# Altium PCB LightningDetector.PcbDoc
Units mil, origin at the board's own origin, x right, y up, seen from the top; angles counter-clockwise.
Board outline 1050 x 1050 mil, 2 copper layers (L1, L2), stack 62.8 mil thick; 18 components, 14 nets, 63 pads, 17 vias.
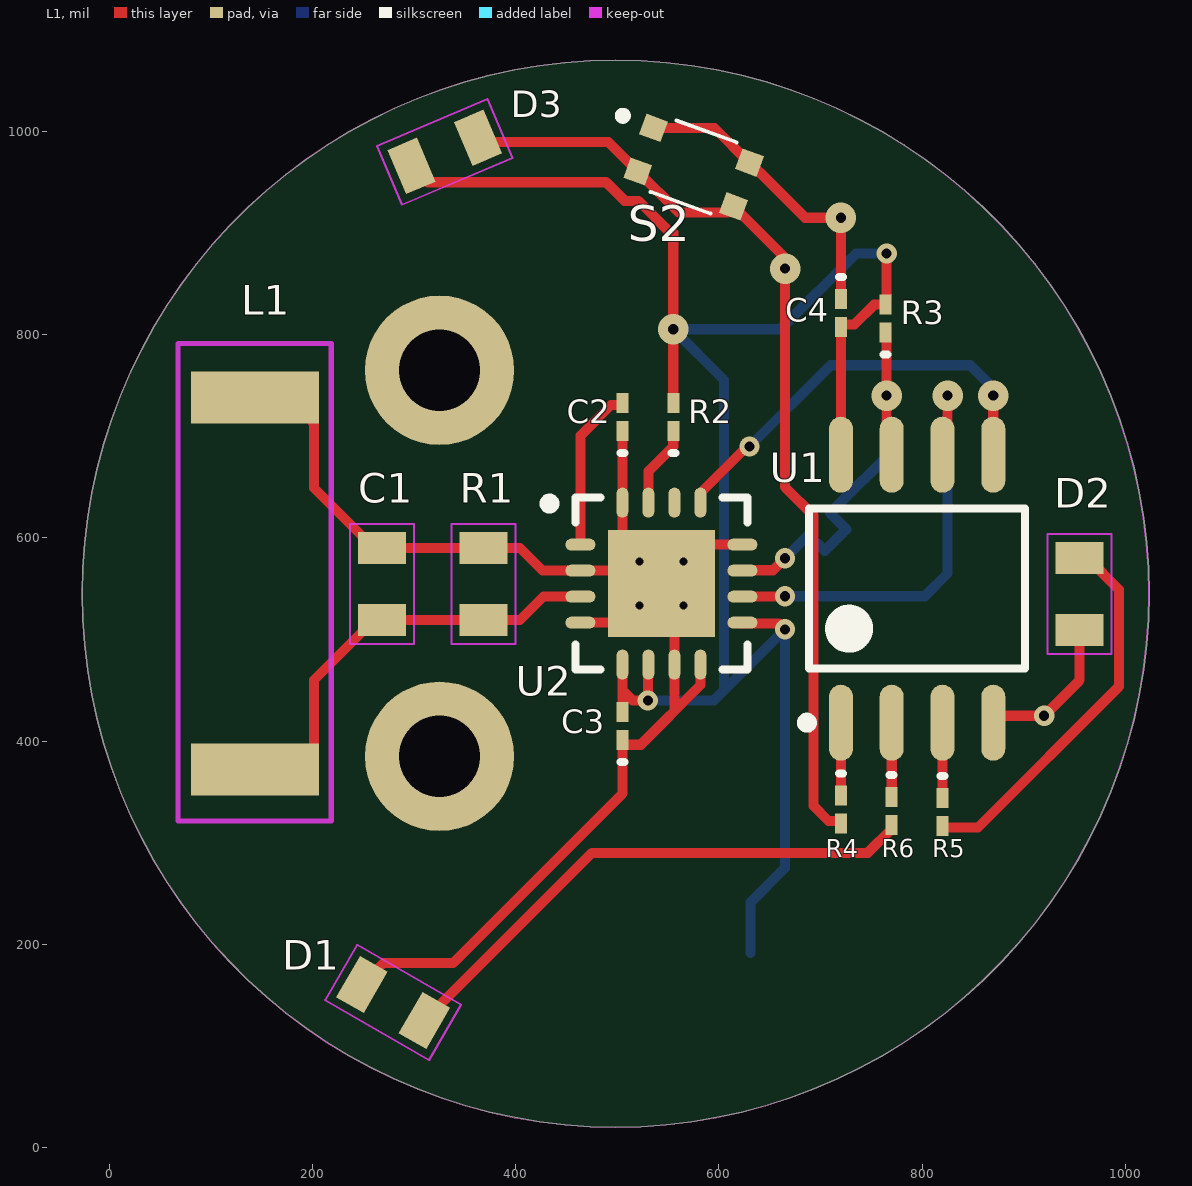
[diagram p0: L1 view]
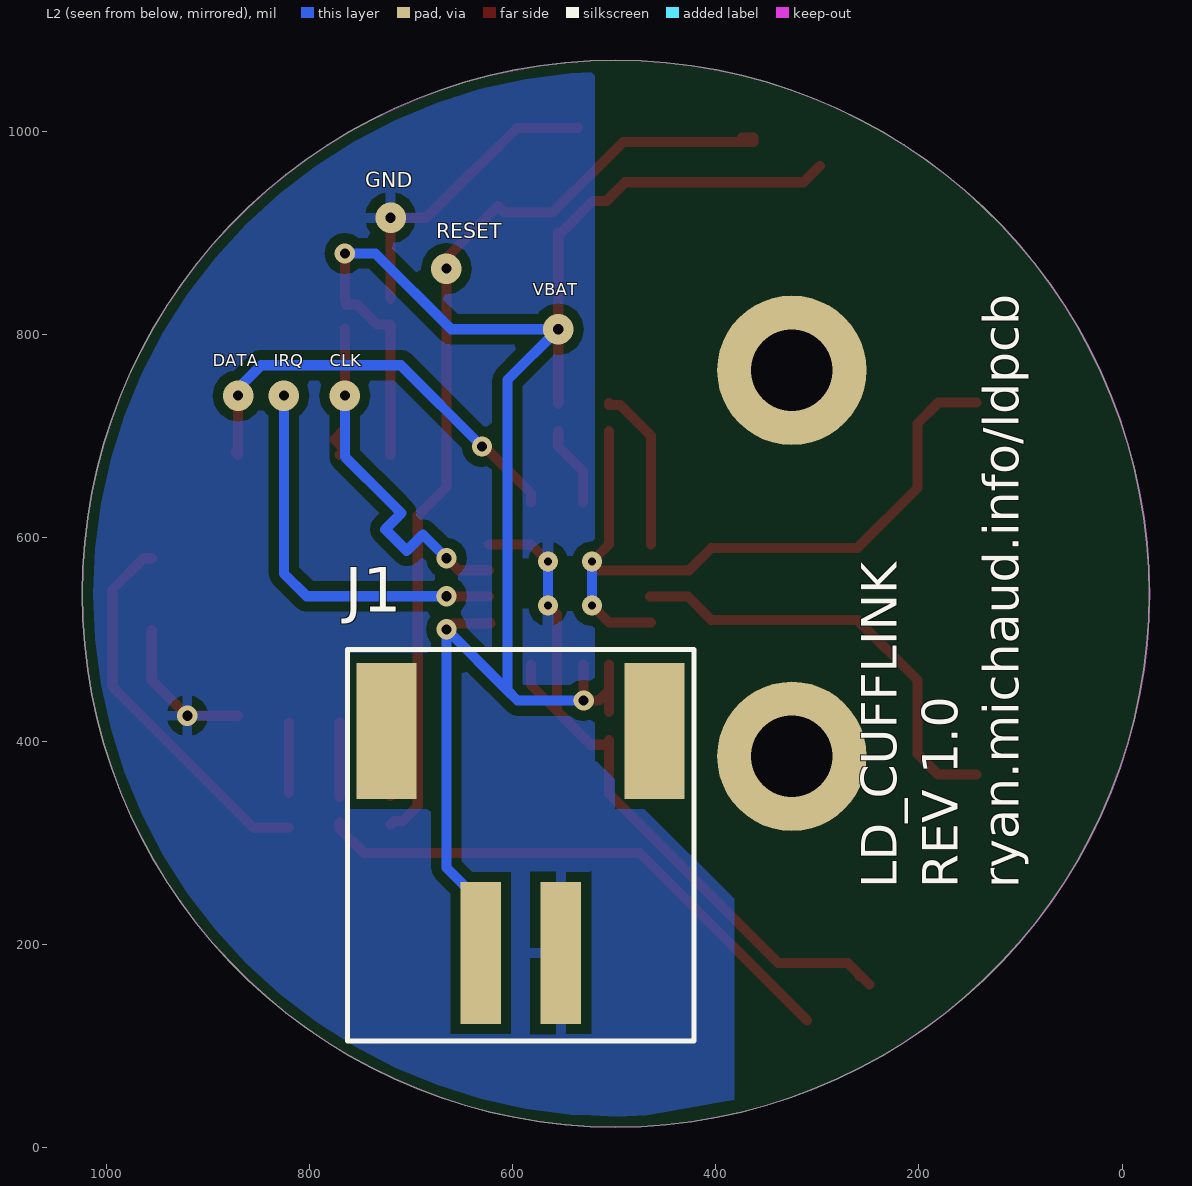
[diagram p1: L2 view, seen from below]

## Layer stack, top to bottom
Top Solder: solder mask 0.1, Solder Resist, Dk 1
L1: signal copper 1.4
Core: dielectric 60, FR-4, Dk 4.6
L2: signal copper 1.4
Bottom Solder: solder mask 0.1, Solder Resist, Dk 1

## Board outline
498.38,20.06 cw(c498.38,545.06) -26.62,545.06 cw(c498.38,545.06) 498.38,1070.06 cw(c498.38,545.06) 1023.38,545.06 cw(c498.38,545.06)

## Design rules (kind name [scope] priority, off if disabled: settings)
Clearance [All] p1: gap=10 ignorepadtopadclearanceinfootprint=FALSE except(0: Arc-Hole Track-Hole SMDPad-Hole THPad-Hole Via-Hole Fill-Hole Poly-Hole Region-Hole Text-Hole)
PolygonConnect [All] p1: connectstyle=Relief reliefconductorwidth=10 reliefentries=4 polygonreliefangle="90 Angle" airgapwidth=10
RoutingVias [All] p1: holewidth=28 width=50 viastyle="Through Hole" minholewidth=28 minwidth=50 maxholewidth=28 maxwidth=50
SolderMaskExpansion [All] p1: expansion=4
Width [All] p1: maxlimit=10 minlimit=10 preferedwidth=10
30 further rules are at their usual default settings.

## Components (designator, comment, footprint, x,y, rotation, side; value= is the part's Value field where it differs from the comment)
C1 "885382207004" 0805 268.38,554.63 r270 top locked value=950pF
C2 "JMK107ABJ106KA-T" 0603 505,718.78 r90 top value=10uF
C3 "CC0603KRX5R8BB105" 0603 505,415 r90 top value=1.0uF
C4 "CC0603JRX7R9BB104" 0603 720,821.22 r270 top value=0.1uF
D1 "LED0" 0805 279.32,142.72 r150 top
D2 "LED0" 0805 955,544.57 r270 top
D3 "LED0" 0805 330,980 r23 top
J1 "1769" 1769 526.18,410 r0 bottom locked
L1 "MA5532-AE" MA5532-AE 143.38,555.06 r90 top locked
R1 "WIN-T0805LF-11-1002-A" 0805 368.38,554.63 r270 top locked value=10K
R2 "ESR03EZPJ222" 0603 555,718.78 r90 top value=2.2K
R3 "CRCW060310K0JNEAC" 0603 764.09,815.79 r90 top value=10K
R4 "RC0603FR-07220RL" 0603 720,332.44 r270 top value=220
R5 "RC0603FR-07220RL" 0603 820,330 r270 top value=220
R6 "RC0603FR-07220RL" 0603 770,331.22 r270 top value=220
S2 "USLPT2819DT2TR" USLPT2819DT2TR 575,965 r340 top
U1 "ATtiny85-20SH" 8S2_L 795,550 r90 top locked
U2 "AS3935-BQFT" AMS-MLPQ-16-4000X4000DE-2675X2675TP_N 543.38,555.06 r0 top locked

## Footprints (in the part's own frame and the unit in brackets; to place one, negate y for a bottom-side part, rotate by r counter-clockwise, add the part's x,y. Pads: shape width x height; smd on the part's side, far side on the other; paste and mask are expansions set on the pad)
8S2_L [mm] "SOP, 8-Leads, Body 5.3x5.3mm, Pitch 1.27mm, IPC High Density"
  oval 1.9x0.6 smd: 1(-3.35,1.905) 2(-3.35,0.635) 3(-3.35,-0.635) 4(-3.35,-1.905) 5(3.35,-1.905) 6(3.35,-0.635) 7(3.35,0.635) 8(3.35,1.905)
  silkscreen extent -3.47,-2.7 2,2.88, body extent -2.7,-2.68 2.7,2.68, height 2.16
0603 [mm] "Chip Inductor, Body 0.6x0.3mm, IPC High Density"
  rect 0.5x0.3 smd: 1(-0.35,0) 2(0.35,0)
  silkscreen extent -0.9,-0.05 -0.9,0.05, body extent -0.33,-0.18 0.33,0.18, height 0.55
0805 [mil]
  rect 31.5x47.24 smd: 1(-35.43,0) 2(35.43,0)
  L1 keep-out lines w2: 59.06,-31.5 -59.06,-31.5 -59.06,31.5 59.06,31.5 59.06,-31.5
1769 [mm] "Adafruit Accessories JST-PH 2-pin SMT Right Angle Connect"
  rect 1.016x3.556 smd: 1(0.667,5.55) 2(2.667,5.55)
  rect 1.5x3.4 smd: ""(-1.681,0) ""(5.02,0)
  silkscreen extent -2.67,-2.03 5.99,7.75
AMS-MLPQ-16-4000X4000DE-2675X2675TP_N [mm] "QFN, 16-Leads, Body 4x4mm, Pitch 0.65mm, Thermal Pad 2.675x2.675mm, IPC Medium Density"
  oval 0.75x0.3 smd: 1(-2.025,0.975) 2(-2.025,0.325) 3(-2.025,-0.325) 4(-2.025,-0.975) 9(2.025,-0.975) 10(2.025,-0.325) 11(2.025,0.325) 12(2.025,0.975)
  oval 0.3x0.75 smd: 5(-0.975,-2.025) 6(-0.325,-2.025) 7(0.325,-2.025) 8(0.975,-2.025) 13(0.975,2.025) 14(0.325,2.025) 15(-0.325,2.025) 16(-0.975,2.025)
  rect 2.675x2.675 smd: 17(0,0)
  silkscreen extent -2.92,-2.15 2.15,2.15, body extent -2,-2 2,2, height 0.8
MA5532-AE [mil]
  rect 51.18x126 smd: 1(-183.07,0) 2(183.07,0)
  L1 keep-out lines w5: -233.87,76 -233.87,-75 236.13,-75 236.13,76 -233.87,76
USLPT2819DT2TR [mm]
  rect 0.57x0.55 smd: T1(-1.275,0.58) T2(1.275,0.58) T3(-1.275,-0.58) T4(1.275,-0.58)
  silkscreen extent -2.2,-0.95 0.8,0.95, body extent -1.51,-0.95 1.51,0.95, height 0.7

## Part data
C1 C2 C3 C4: library part Cap, "Capacitor"
  C1: PackageDescription=0805, Part Number=885382207004
  C2: PackageDescription="Multilayer Ceramic Capacitors MLCC - SMD/SMT 0603 6.3V 10uF 10% X5R", PackageReference=0603
  C3: PackageDescription="Multilayer Ceramic Capacitors MLCC - SMD/SMT 1.0uF 25V X5R 10%", PackageReference=0603
  C4: PackageDescription="Multilayer Ceramic Capacitors MLCC - SMD/SMT .1uF 50V X7R 5%", PackageReference=0603
D1 D2 D3: "Typical INFRARED GaAs LED", LatestRevisionDate=08-Jul-2005, LatestRevisionNote="Mech Layer 1 removed.", PackageDescription="LED; 2 Leads", PackageReference=LED-0, Published=8-Jun-2000, Publisher="Altium Limited"
J1: "Adafruit Accessories JST-PH 2-pin SMT Right Angle Connect"
R1 R2 R3 R4 R5 R6: library part Res1, "Resistor"
  R1: PackageDescription="Axial Device, Thru-Hole; 2 Leads; 0.3 in Pin Spacing", PackageReference=0805, Part Number=WIN-T0805LF-11-1002-A
  R2: PackageDescription="Thick Film Resistors - SMD 0603 2K2ohm 5% Anti Surge AEC-Q200", PackageReference=0603, Part Number=ESR03EZPJ222
  R3: PackageDescription="Thick Film Resistors - SMD 1/10Watt 10Kohms 5% Commercial Use", PackageReference=0603
  R4: PackageDescription="Axial Device, Thru-Hole; 2 Leads; 0.3 in Pin Spacing", PackageReference=0603
  R5 R6: PackageDescription="Thick Film Resistors - SMD 220 OHM 1%", PackageReference=0603
S2: "Switch", Manufacturer_Name="TE Connectivity", Mouser Part Number=506-USLPT2819DT2TR, Datasheet Link=https://componentsearchengine.com/Datasheets/1/USLPT2819DT2TR.pdf, Height=0.6mm, Manufacturer_Part_Number=USLPT2819DT2TR, Mouser Price/Stock=https://www.mouser.com/Search/Refine.aspx?Keyword=506-USLPT2819DT2TR
U1: library part CMP-0093-00347-1, "8-bit AVR Microcontroller, 20MHz, 2.7-5.5V, 8K Flash, 512 Bytes EEPROM, 512 Bytes SRAM, Industrial Grade (-40°C to 85°C), 8-Lead SOIC, Pb-Free", ComponentLink1Description="Manufacturer URL", ComponentLink1URL=http://www.atmel.com/, ComponentLink2Description="ATtiny25/45/85 Datasheet", ComponentLink2URL=http://www.atmel.com/dyn/resources/prod_documents/doc2586.pdf, ComponentLink3Description="ATtiny25/45/85 Summary", ComponentLink3URL=http://www.atmel.com/dyn/resources/prod_documents/2586S.pdf, DatasheetVersion="revN, Apr-2011", PackageDescription="8-Lead, 0.208\" Body, Plastic Small Outline Package (EIAJ)", PackageReference=8S2, PackageVersion="revF, Apr-2008"
U2: library part CMP-0557-00001-2, "Franklin Lightning Sensor(TM) IC, 2.4 to 5.5 V, MLPQ-16, Pb-Free, Reel", Current Consumption (uA)="0.4 / 50 / 210", Manufacturer=AMS, ComponentLink1Description="Manufacturer URL", ComponentLink1URL=www.ams.com, ComponentLink2Description=Datasheet, ComponentLink2URL=http://www.ams.com/eng/content/download/249847/974777/143418, DatasheetVersion="Rev. 1.2", Interface="SPI or I²C", Mounting Technology="Surface Mount", PackageDescription="16-Pin Plastic Quad Flatpack, No Leads, 4 x 4 mm Body, 0.65 mm Pitch, 2.675 x 2.675 mm Exposed Pad", PackageReference=MLPQ-16, PackageVersion="Rev. 1.2, 07/2012", PartNumber=AS3935-BQFT, Supply (V)="2.4 to 5.5"
L1: DeviceSetName=MA5532-AE, GateName_1=G$1, LibraryName=SparkFun-Coils, Package=MA5532-AE, PROD_ID=NDUC-11334, SymbolName_1=INDUCTOR-1

## Free pads (board coordinates)
  round 147 hole 80: 2(325,765) 3(325,385)

## Via types
v1: diameter 30, hole 10, L1 to L2, 6 vias
v2: diameter 20, hole 10, L1 to L2, 6 vias
v3: diameter 19.68, hole 7.87, L1 to L2, 4 vias
v4: diameter 20/20 (per signal layer), hole 10, L1 to L2, 1 vias

## Nets (pads, with @x,y where several pads share a name; then routed paths per layer and width w, separated by ;. In a path a pad name is that pad's centre, name@x,y a point inside that pad or via, vN(x,y) a via of type N, cw(c..) or ccw(c..) an arc to the next point about the centre after c; other vN are vias at no path point)
AC_GND: C2.2 U2.1 | length 162.8
  L1 w10: U2.1 463.65,700.61 493.79,730.75 505,730.75 C2.2
ADD0: R2.1 U2.15 | length 80.3
  L1 w10: U2.15 530.58,665.58 555,690 R2.1
ANT_IN: C1.2 L1.1 R1.2 U2.3 | length 436.2
  L1 w10: L1.1@143.38,366.99 180.79,366.99 201.38,387.58 201.38,460.07 260.51,519.2 C1.2 R1.2 404.2,519.2 427.27,542.26 U2.3@464.54,542.26
GND: C1.1 C2.1 C3.1 C4.1 D1.2 D2.2 J1.1 L1.2 R1.1 S2.T1 S2.T2 U1.4 U2.2 U2.4 U2.7 U2.8 U2.12 U2.16 U2.17 | length 1918.3
  L1 w10: L1.2@143.38,733.13 180.79,733.13 201.38,712.54 201.38,649.19 260.51,590.06 C1.1 R1.1 404.17,590.06 426.38,567.86 U2.2 U2.17@521.72,567.86 ; D1.2@258.33,168.33 256.53,168.33 D1.2 269.84,181.64 338.36,181.64 505,348.28 C3.1@505,397.28 ; U2.4 504.99,516.67 v3(521.72,533.41) ; C2.1 U2.16 504.99,593.45 v3(521.72,576.71) ; S2.T1 535.77,1003.49 595.54,1003.49 629.74,969.29 S2.T2 630.21,969.29 639.5,960 640,960 684.84,915.16 v1(720,915.16) C4.1 ; 556.17,430 U2.7 556.17,524.55 v3(565.03,533.41) ; v3(565.03,576.71) 581.76,593.45 U2.12 ; U2.8 581.76,455.16 522.98,396.38 505.91,396.38 C3.1@505,397.28 ; U1.4@870,425 v2(920,425) 955,460 D2.2 ; C3.1@505,397.28 C3.1 C3.1@504.99,397.29
  L2 w10: v3(521.72,533.41) v3(521.72,576.71) ; v3(565.03,533.41) v3(565.03,576.71)
I2C_CLK: R3.1 U1.7 U2.11 | length 428.2
  L1 w10: U2.11 623.45,568.2 653.2,568.2 v2(665,580) ; R3.1@765,806.22 765,804.72 765,790 v1(765,740) 765,706.89 775,696.89 765,686.89 U1.7
  L2 w10: v2(665,580) 682.5,597.5 688.18,603.18 704.15,587.21 725.36,608.43 709.39,624.39 720,635 765,680 v1(765,740)
I2C_Data: U1.5 U2.13 | length 428.1
  L1 w10: U2.13 581.76,644.13 627.63,690 v2(630,690) ; v1(870,740) U1.5 U1.5@872.5,684.39
  L2 w10: v2(630,690) 710,770 847.43,770 870,747.43 v1(870,740)
I2C_IRQ: U1.6 U2.10 | length 429.4
  L1 w10: U2.10 667.26,542.26 v2@667.5,542.5 ; U1.6@825,696.89 v1(825,740)
  L2 w10: v2@667.5,542.5 802.5,542.5 825,565 v1(825,740)
  other v2: 665,542.5
LED_1: D1.1 R6.2 | length 544.6
  L1 w10: D1.1 475,290 746.5,290 770,313.5 R6.2 R6.2@770,320
LED_2: D2.1 R5.2 | length 378
  L1 w10: R5.2@820,315 855,315 993.62,453.62 993.62,549.25 962.87,580 D2.1
LED_3: D3.2 R4.2 S2.T3 S2.T4 | length 955.8
  L1 w10: D3.2@373.97,993.84 D3.2 362.61,989.67 491.06,989.67 S2.T3 560.37,920.37 608.12,920.37 614.12,926.37 S2.T4 665,875.73 v1(665,865) 665,840 665,650 693.19,621.81 693.19,336.07 707.88,321.38 716.42,321.38 R4.2@720,317.8
P3_Out: R6.1 U1.2 | length 73.1
  L1 w10: R6.1 U1.2
P4_Out: R5.1 U1.3 | length 69.3
  L1 w10: R5.1@820,348.78 U1.3
P5_Out: R4.1 U1.1 | length 71.9
  L1 w10: R4.1 U1.1
VDD: C3.2 C4.2 D3.1 J1.2 R2.2 R3.2 U1.8 U2.5 U2.6 U2.9 | length 1945.6
  L1 w10: D3.1 313.54,950 488.94,950 507.24,931.7 520.75,931.7 552.08,900.37 555,900.37 v1(555,805.41) ; C3.2 505,450 ; U2.5 504.99,450 ; U2.6 530,474.76 v2(530,440) 515,440 505,450 ; R2.2 v1@555,800.83 ; U2.9 622.39,516.67 621.55,515.84 659.16,515.84 v4(665,510) ; U1.8 C4.2 720,809.25 720.91,810.16 733.47,810.16 752.88,829.57 R3.2 ; R3.2@765,835 v2(765,880)
  L2 w10: v2(530,440) 595,440 605,450 ; J1.2 631.18,241.5 665,275.31 v4(665,510) 605,450 ; v2(765,880) 735,880 660.41,805.41 v1(555,805.41) 605,755.41 605,450
pads on no net: J1. U2.14

## Polygon pours and split planes (outlines as drawn)
GND on L2 "L2-GND" (solid, pour order 6): 518.88,1066.33 518.88,23.41 ccw(c496.57,544.87)
GND on L2 "L2-GND 6" (solid, pour order 86): 521.92,384.66 381.92,244.66 381.92,47.07 521.92,22.25
GND on L2 "L2-GND 4" (solid, pour order 90): 445,330
GND on L2 "L2-GND 5" (solid, pour order 88): 360,400
GND on L2 "L2-GND 7" (solid, pour order 75): 770,1065
GND on L2 "L2-GND 1" (solid, pour order 47): 15535,1150
no net on L2 "L2-No Net" (solid, pour order 40): 495,1060
GND on L2 "L2-GND 2" (solid, pour order 38): 55,5
GND on L2 "L2-GND 3" (solid, pour order 10): 950,945
GND on Mechanical 1 (solid): 480,1060
GND on Mechanical 1 (solid): 485,910
GND on L1 "L1-GND" (solid, pour order 81): 510,1060
GND on L1 "L1-GND 1" (solid, pour order 53): 1045,1055

## Keep-outs
Keep-Out Layer:
  circle w1: c498,545 r525

## Silkscreen, mask and mechanical layers (free items; w line width, h text height)
Bottom Overlay:
  text "GND" at 745,940 h25
  text "RESET" at 675,890 h25
  text "VBAT" at 580,835 h20
  text "CLK" at 780,765 h20
  text "IRQ" at 835,765 h20
  text "DATA" at 895,765 h20
  text "LD_CUFFLINK / REV 1.0 / ryan.michaud.info/ldpcb" at 90,255 h60 r270